# Altium PCB МЦТР.00010582.00.002.PcbDoc
Units mm, origin at the board's own origin, x right, y up, seen from the top; angles counter-clockwise.
Board outline 112.2 x 115.2 mm, 4 copper layers (Top Layer, GND, Power, Bottom Layer), stack 1.486 mm thick; 91 components, 94 nets, 320 pads, 62 vias.
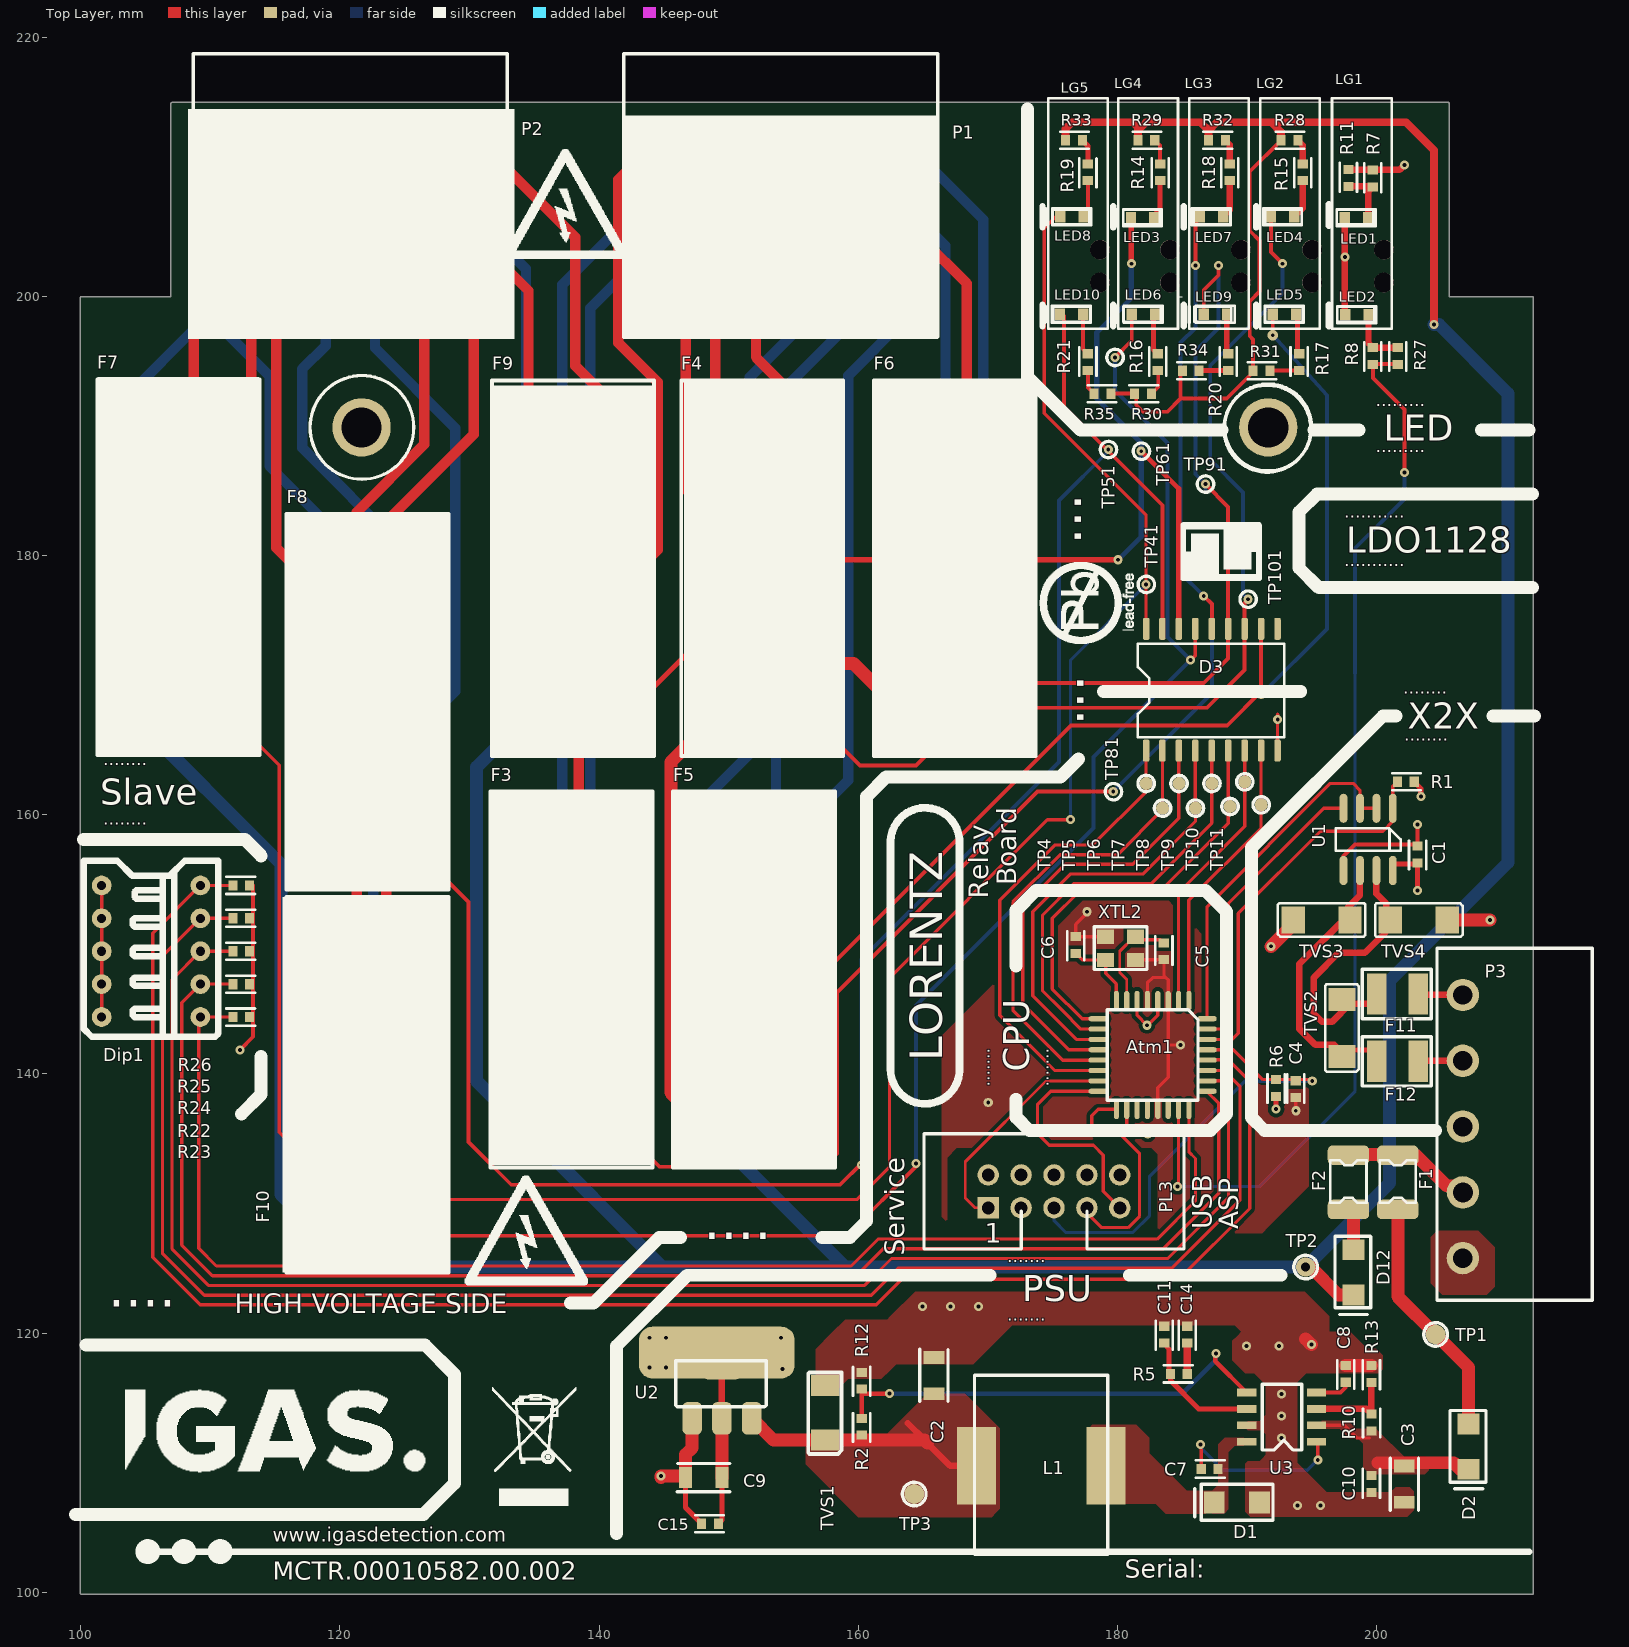
[diagram p0: Top Layer view]
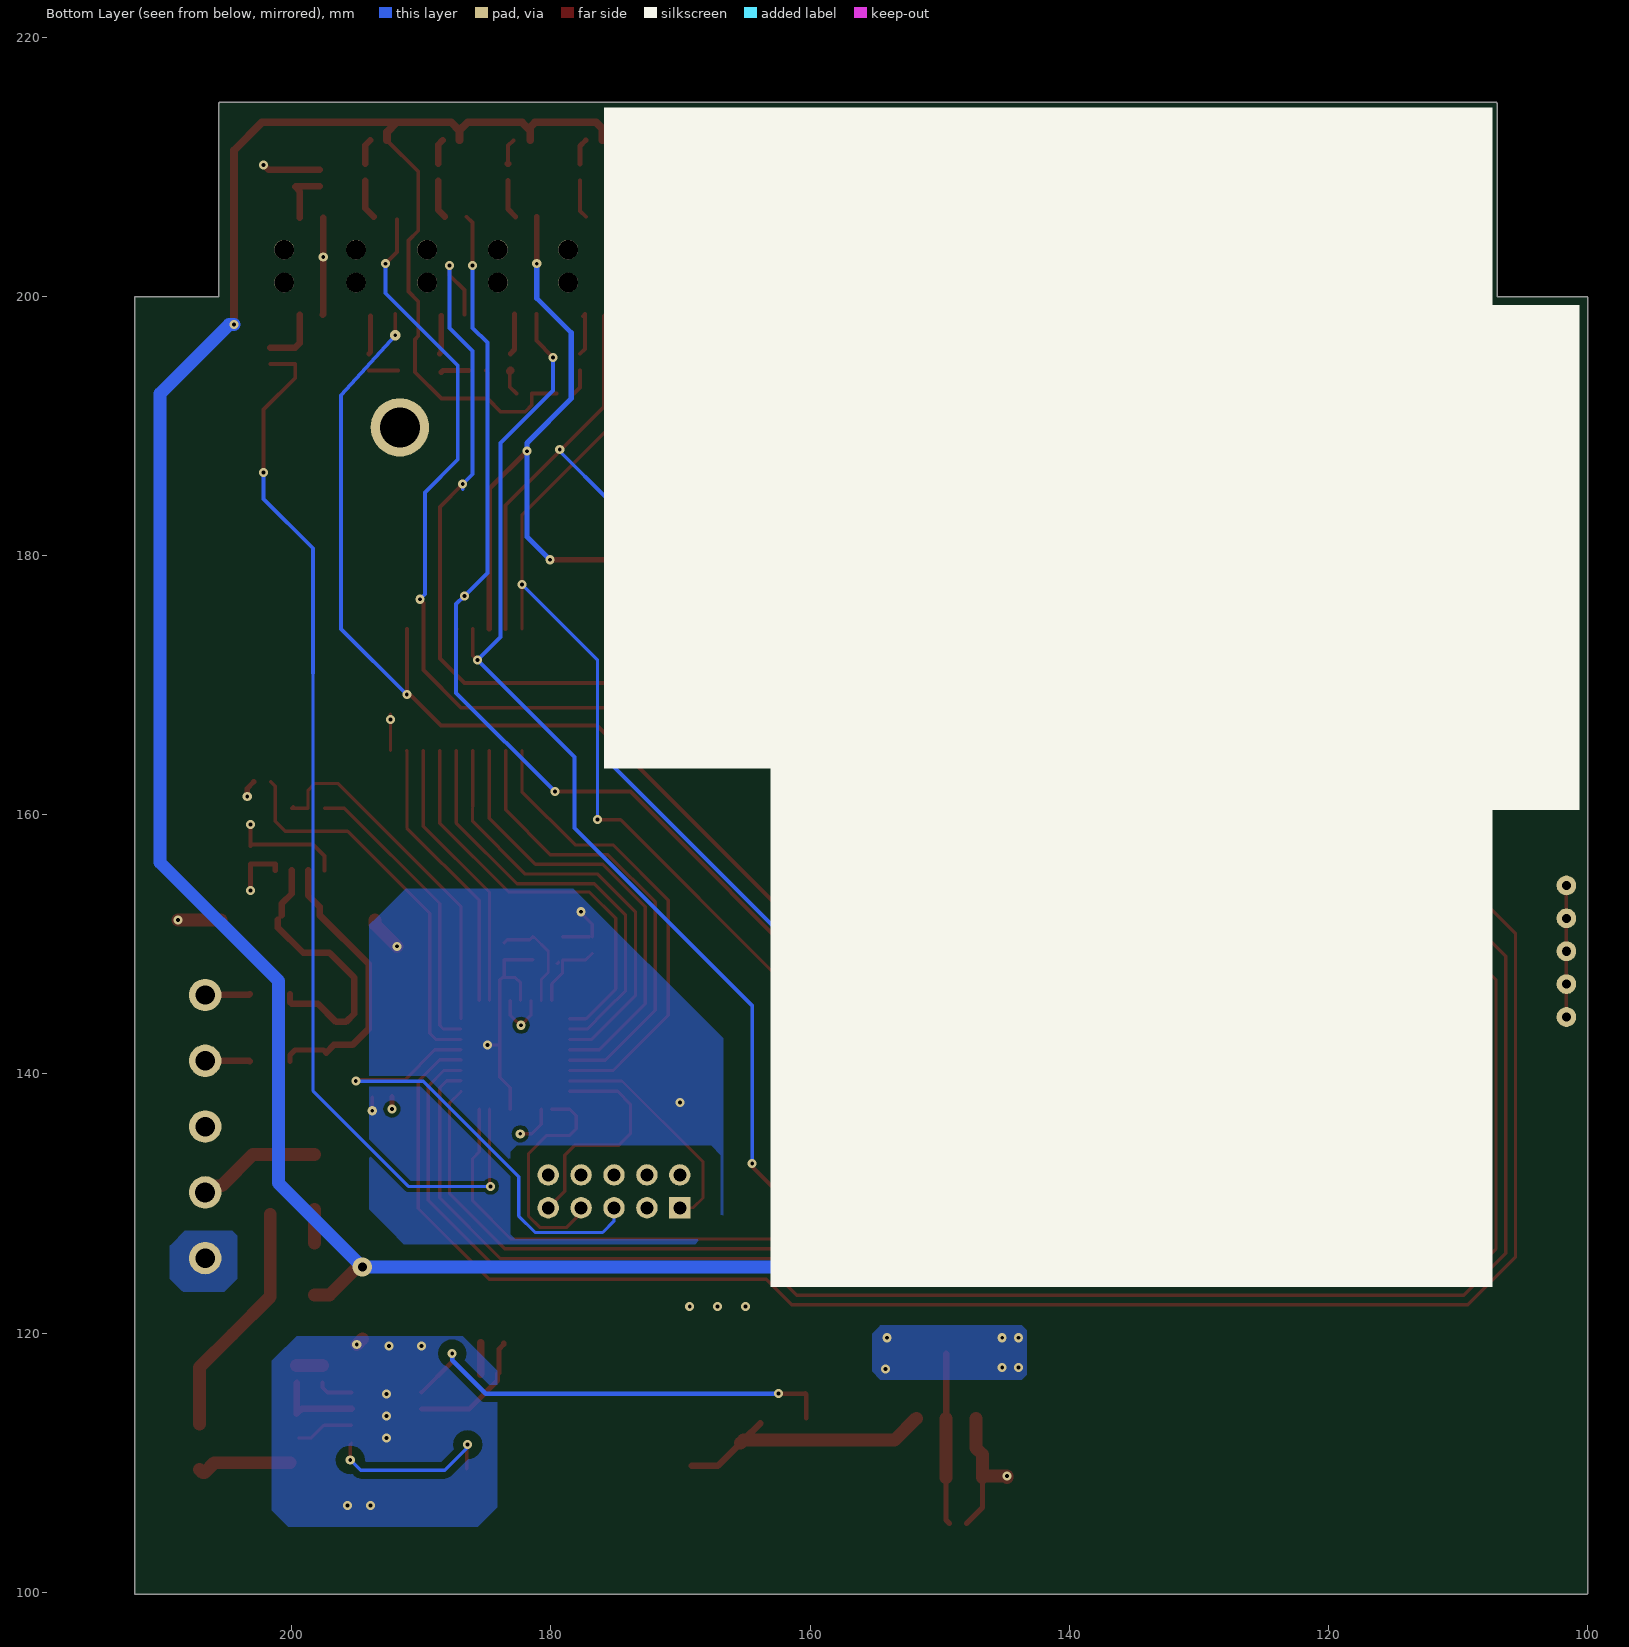
[diagram p1: Bottom Layer view, seen from below]
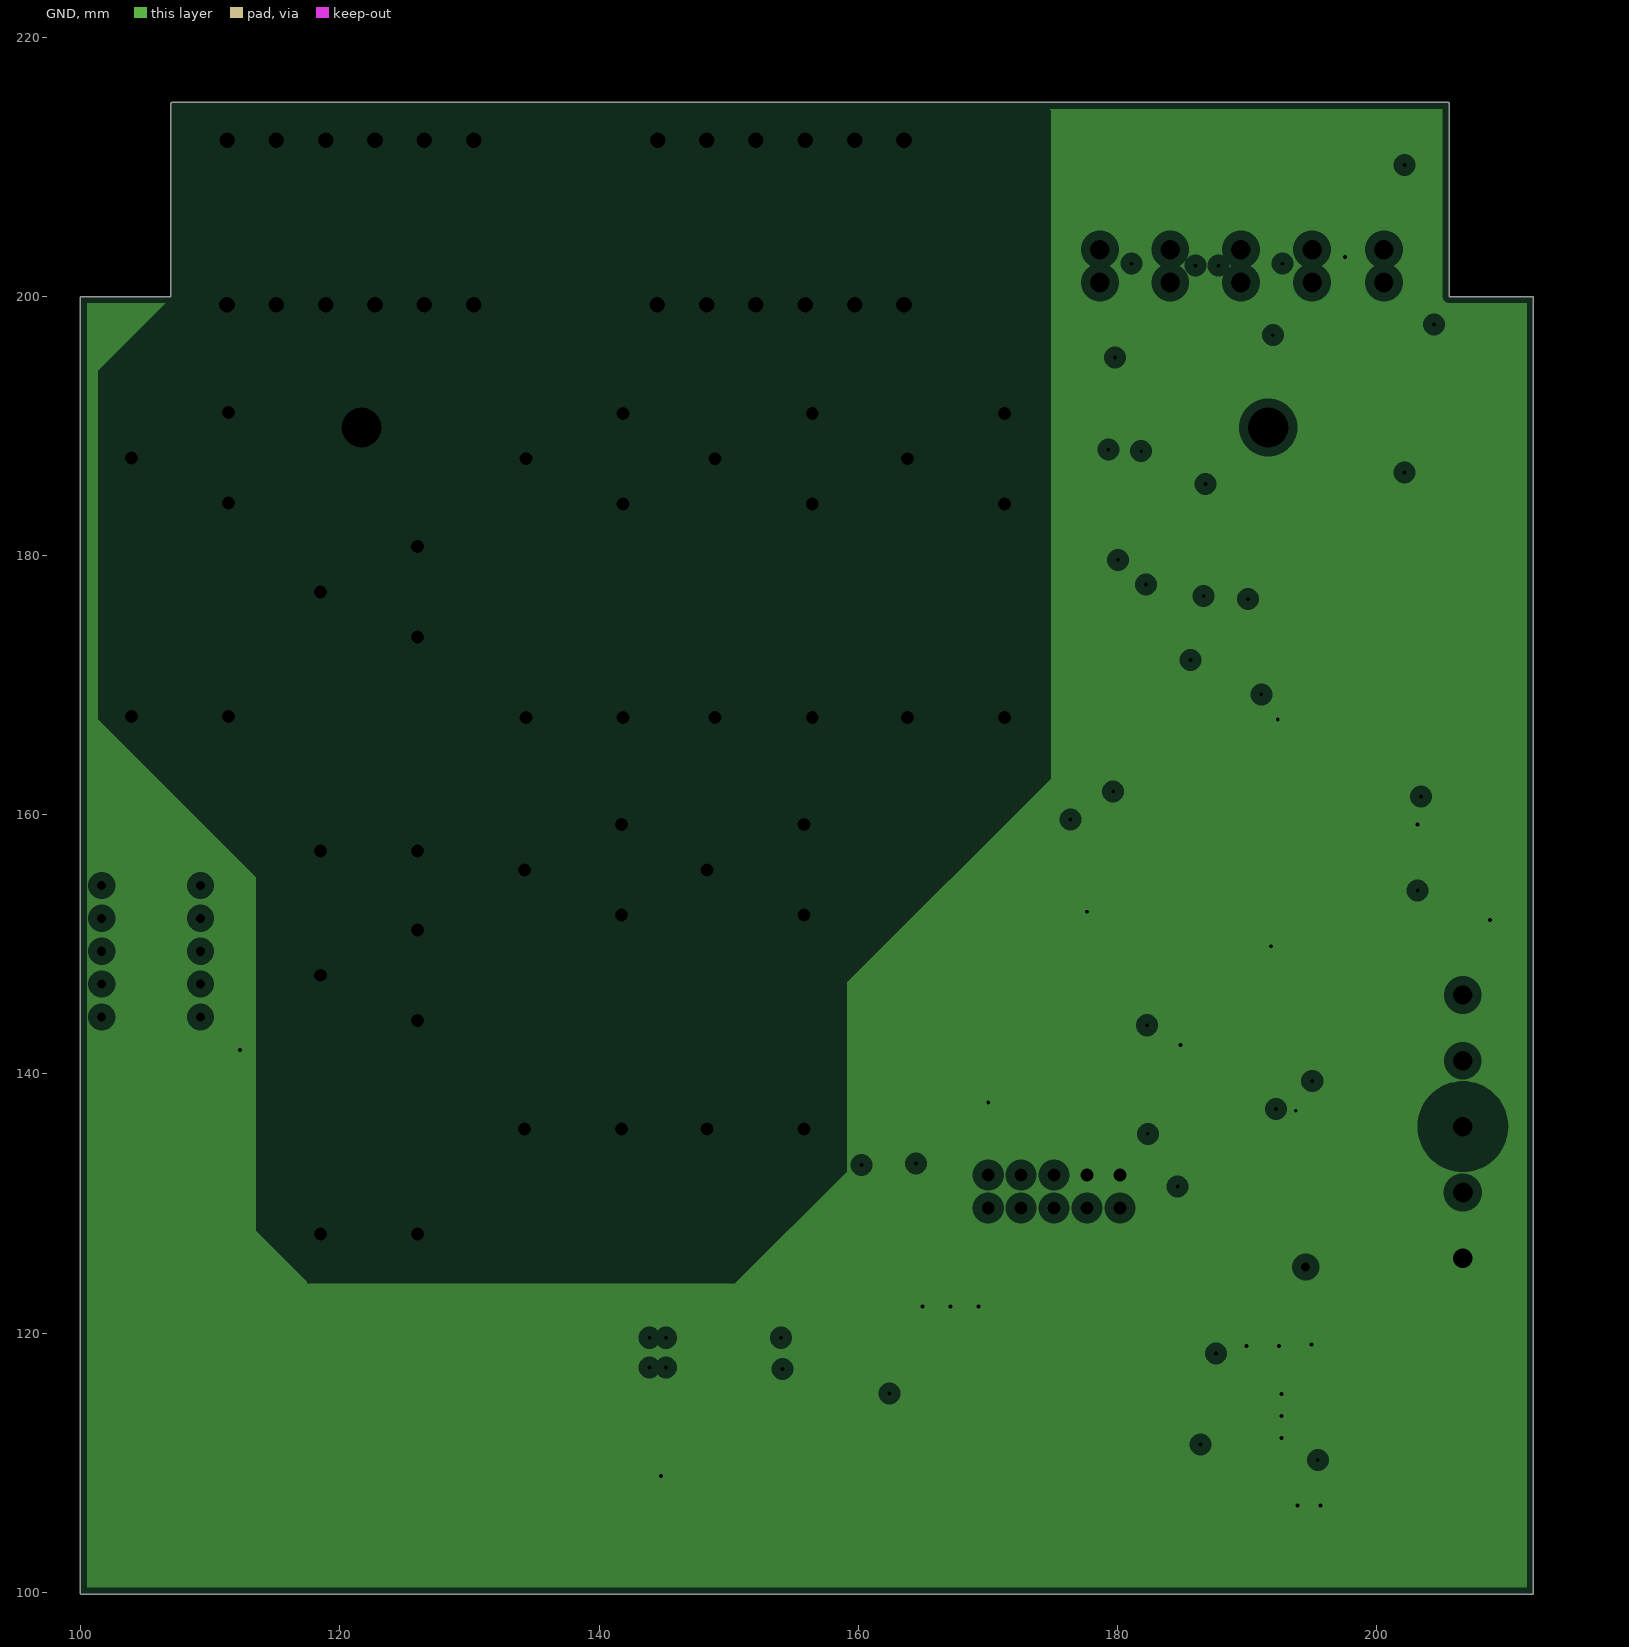
[diagram p2: GND, clearances drawn from the general rule]
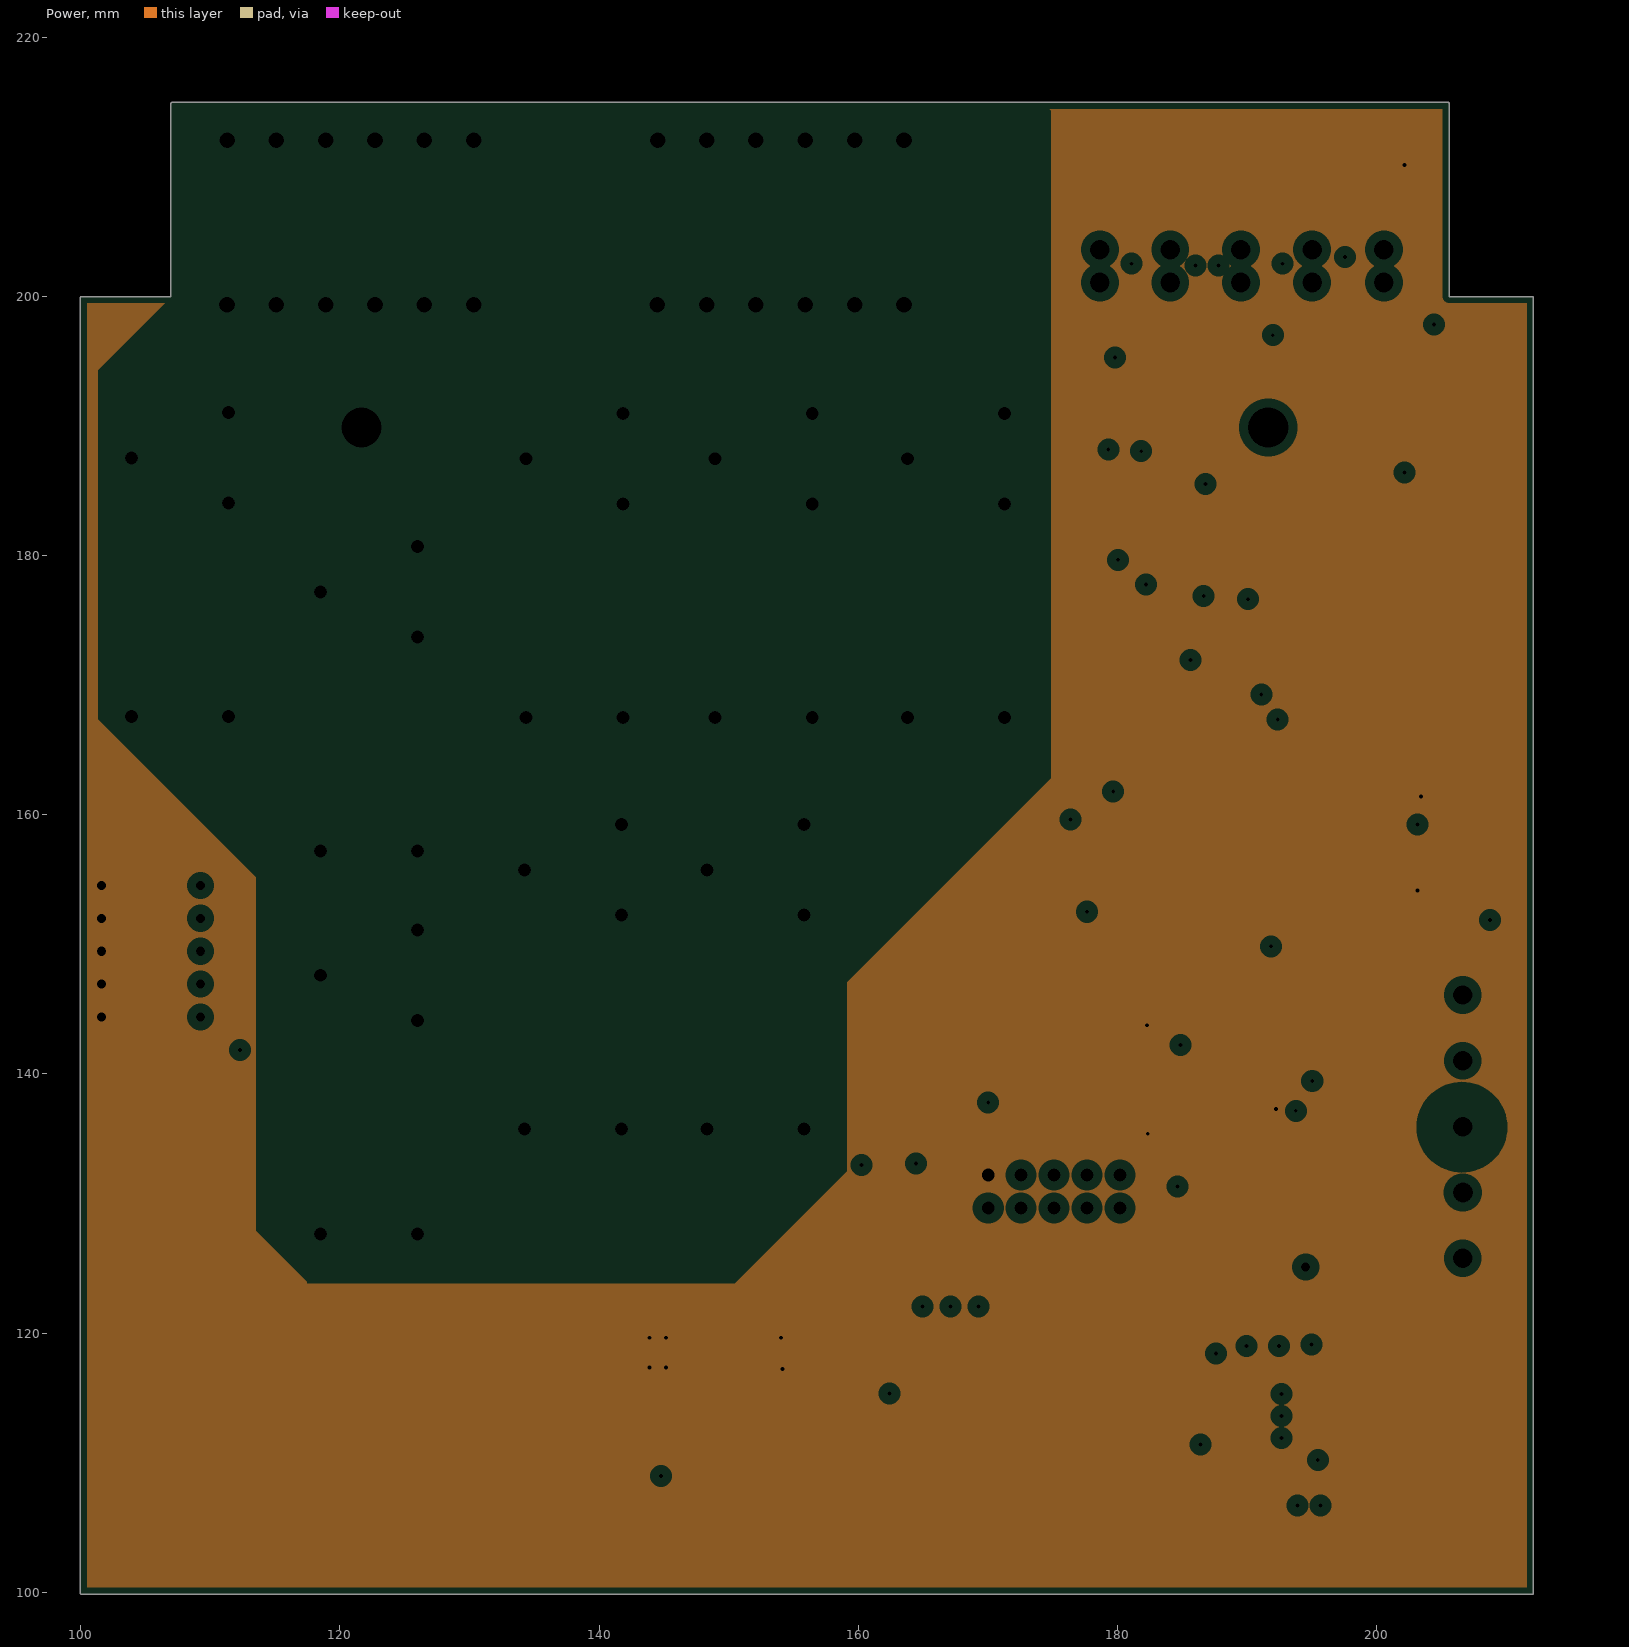
[diagram p3: Power, clearances drawn from the general rule]
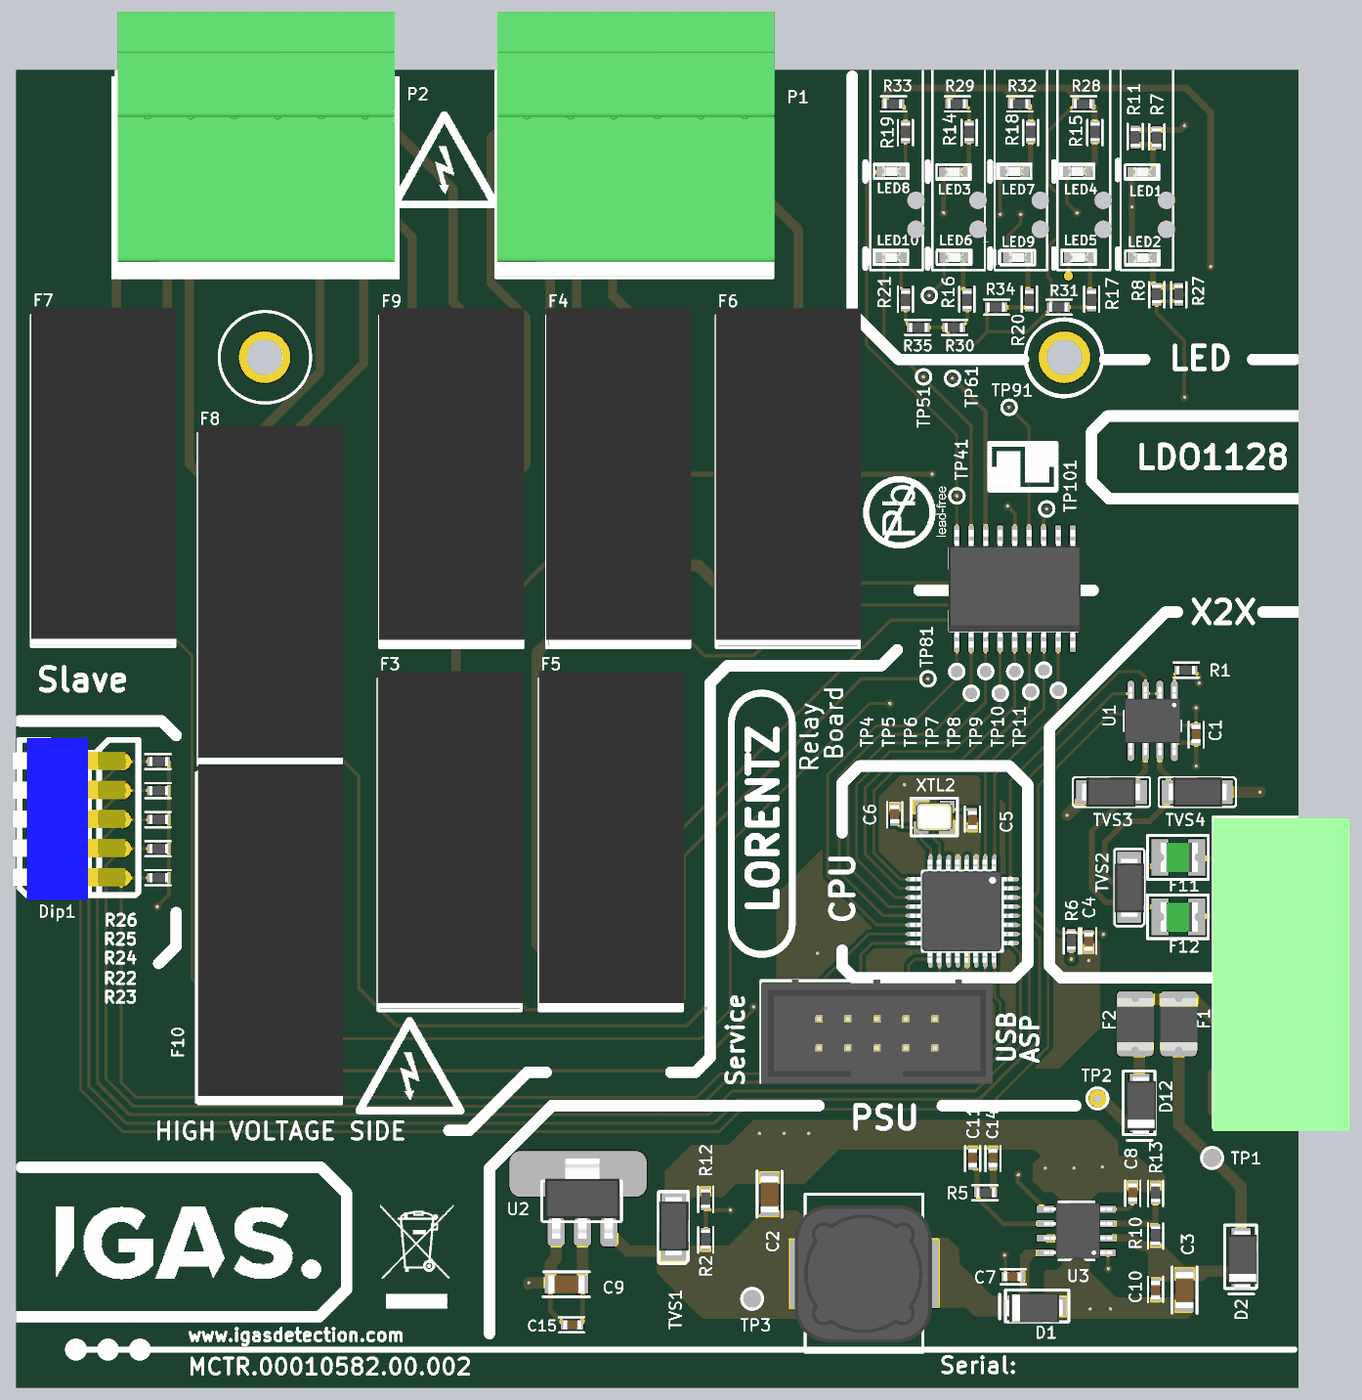
[diagram p4: 3D render of the assembled board from above, using the file's embedded part models]

## Layer stack, top to bottom
Top Solder: solder mask 0.0102, Solder Resist, Dk 3.5
Top Layer: signal copper 0.0356
Dielectric1: prepreg 0.127, FR-4, Dk 4.2
GND: plane copper 0.0356, net GND
Dielectric 3: core 1.09, Dk 4.2
Power: plane copper 0.0356, net +5V
Dielectric 2: prepreg 0.127, Dk 4.2
Bottom Layer: signal copper 0.0356
Bottom Solder: solder mask 0.0102, Solder Resist, Dk 3.5

## Board outline
99.95,99.925 99.95,199.925 cw(c100.05,199.925) 100.05,200.025 103.913,200.025 cw(c103.913,199.925) 103.913,200.025 106.95,200.025 106.95,214.925 cw(c107.05,214.925) 107.05,215.025 205.55,215.025 cw(c205.55,214.925) 205.65,214.925 205.65,200.025 212.05,200.025 cw(c212.05,199.925) 212.15,199.925 212.15,99.925 cw(c212.05,99.925) 212.05,99.825 100.051,99.825 cw(c100.05,99.925)

## Design rules (kind name [scope] priority, off if disabled: settings)
Clearance [All] p1: gap=0.3 ignorepadtopadclearanceinfootprint=FALSE except(0: Arc-Hole Track-Hole SMDPad-Hole THPad-Hole Via-Hole Fill-Hole Poly-Hole Region-Hole Text-Hole)
HoleSize [All] p1: absolutevalues=TRUE maxlimit=4.54 minlimit=0.025 maxpercent=80.000 minpercent=20.000
PlaneClearance [All] p1: clearance=0.7
PlaneConnect [All] p1: planeconnectstyle=Direct reliefexpansion=0.5 reliefentries=2 reliefconductorwidth=0.254 reliefairgap=0.3
PolygonConnect [All] p1: connectstyle=Direct reliefconductorwidth=0.254 reliefentries=2 polygonreliefangle="90 Angle" airgapwidth=0.4
RoutingVias [All] p1: holewidth=0.711 width=1.27 viastyle="Through Hole" minholewidth=0.4 minwidth=0.4 maxholewidth=3 maxwidth=4
SilkToSilkClearance [All] p1 off: silktosilkclearance=0.254
SilkToSolderMaskClearance [IsPad] p1 off: minsilkscreentomaskgap=0.254 clearancetoexposedcopper=TRUE
SolderMaskExpansion [All] p1: expansion=0.102
Width [All] p1: maxlimit=1.254 minlimit=0.22 preferedwidth=0.254
25 further rules are at their usual default settings.

## Classes and differential pairs
component class RS485: C1 F11 F12 R1 TVS2 TVS3 TVS4 U1
component class CPU: Atm1 C4 C5 C6 Dip1 LED1 LED2 LG1 PL3 R6 R7 R8 R11 R22 R23 R24 R25 R26 R27 XTL2
component class Plugs: P3
component class PSU: C2 C3 C7 C8 C9 C10 C11 C14 C15 D1 D2 D12 F1 F2 L1 R2 R5 R10 R12 R13 TVS1 U2 U3
component class Relays: D3 F3 F4 F5 F6 F7 F8 F9 F10 LED3 LED4 LED5 LED6 LED7 LED8 LED9 LED10 LG2 LG3 LG4 LG5 P1 P2 R14 R15 R16 R17 R18 R19 R20 R21 R28 R29 R30 R31 R32 R33 R34 R35

## Components (designator, comment, footprint, x,y, rotation, side; value= is the part's Value field where it differs from the comment)
Atm1 "" Atmega168 185.547,145.669 r180 top
C1 "100n" 0603_Cap 203.2,157.607 r180 top
C2 "22uF" 1206_CAP 165.862,118.11 r180 top
C3 "10uF" 1206_CAP 202.184,106.934 r0 top
C4 "100n" 0603_Cap 193.802,138.176 r0 top
C5 "18p" 0603_Cap 183.619,148.827 r0 top
C6 "18p" 0603_Cap 176.819,150.605 r180 top
C7 "100n" 0603_Cap 186.5,109.5 r270 top
C8 "10n" 0603_Cap 197.65,117.5 r180 top
C9 "22uF" 1206_CAP 146.685,108.839 r270 top
C10 "100n" 0603_Cap 199.644,107.696 r0 top
C11 "18p" 0603_Cap 183.642,120.523 r180 top
C14 "10n" 0603_Cap 185.42,120.523 r180 top
C15 "100n" 0603_Cap 149.225,105.283 r90 top
D1 "" B340A-13-F 187.5,106.9 r0 top
D2 "" B340A-13-F 207.137,109.474 r90 top
D3 "" "SOIC 18" 182.245,164.973 r0 top
D12 "" B340A-13-F 198.247,122.936 r90 top
Dip1 "" "DipSwitch 5" 101.6,154.559 r270 top
F1 "" "Fuse USMF030" 201.676,129.54 r90 top
F2 "" "Fuse USMF030" 197.866,129.54 r90 top
F3 "finder" 413190240010 141.732,135.763 r90 top
F4 "finder" 413190240010 156.464,167.513 r90 top
F5 "finder" 413190240010 155.829,135.763 r90 top
F6 "finder" 413190240010 171.323,167.513 r90 top
F7 "finder" 413190240010 111.386,167.589 r90 top
F8 "finder" 413190240010 125.984,157.226 r90 top
F9 "finder" 413190240010 141.859,167.513 r90 top
F10 "finder" 413190240010 125.984,127.635 r90 top
F11 "Fuse PTS" 1210_MF 203.252,146.177 r90 top
F12 "Fuse PTS" 1210_MF 203.252,140.97 r90 top
L1 "" CDRH127/LDNP-270MC, 179.15,109.75 r90 top
LED1 "" "0603 - LED" 199.39,206.121 r90 top
LED2 "" "0603 - LED" 199.415,198.628 r90 top
LED3 "" "0603 - LED" 182.88,206.121 r90 top
LED4 "" "0603 - LED" 193.691,206.19 r90 top
LED5 "" "0603 - LED" 193.827,198.672 r90 top
LED6 "" "0603 - LED" 182.935,198.672 r90 top
LED7 "" "0603 - LED" 188.189,206.19 r90 top
LED8 "" "0603 - LED" 177.43,206.19 r90 top
LED9 "" "0603 - LED" 188.493,198.65 r90 top
LED10 "" "0603 - LED" 177.38,198.672 r90 top
LG1 "" "LED SMD DayLight" 200.6,203.65 r180 top
LG2 "" "LED SMD DayLight" 195.063,203.65 r180 top
LG3 "" "LED SMD DayLight" 189.561,203.65 r180 top
LG4 "" "LED SMD DayLight" 184.103,203.65 r180 top
LG5 "" "LED SMD DayLight" 178.675,203.65 r180 top
P1 "" "mcd 1,5/6-G1-3.81" 163.55,199.4 r0 top
P2 "" "mcd 1,5/6-G1-3.81" 130.325,199.4 r0 top
P3 "" "MSTBA 1757271" 206.7,146.1 r270 top
PL3 "" IDC-10MS 170.053,129.667 r0 top
R1 "10k" 0603_Res 201.646,162.56 r270 top
R2 "10k" 0603_Res 160.274,113.411 r180 top
R5 "10k" 0603_Res 185.42,116.84 r90 top
R6 "10k" 0603_Res 192.278,139.573 r180 top
R7 "1k" 0603_Res 199.75,208.5 r0 top
R8 "1k" 0603_Res 199.75,196.088 r180 top
R10 "100k" 0603_Res 199.65,113.75 r180 top
R11 "1k" 0603_Res 197.866,208.534 r0 top
R12 "1k4" 0603_Res 160.274,116.967 r180 top
R13 "10k" 0603_Res 199.644,117.475 r180 top
R14 "1k" 0603_Res 183.328,210.278 r180 top
R15 "1k" 0603_Res 194.338,210.278 r180 top
R16 "1k" 0603_Res 183.134,194.31 r0 top
R17 "1k" 0603_Res 194.056,194.31 r0 top
R18 "1k" 0603_Res 188.711,210.278 r180 top
R19 "1k" 0603_Res 177.75,210.278 r180 top
R20 "1k" 0603_Res 188.595,194.31 r0 top
R21 "1k" 0603_Res 177.75,194.31 r0 top
R22 "10k" 0603_Res 113.03,144.399 r90 top
R23 "10k" 0603_Res 113.03,146.939 r90 top
R24 "10k" 0603_Res 113.03,149.479 r90 top
R25 "10k" 0603_Res 113.03,152.019 r90 top
R26 "10k" 0603_Res 113.03,154.559 r90 top
R27 "1k" 0603_Res 201.676,196.088 r180 top
R28 "1k" 0603_Res 192.659,212.09 r270 top
R29 "1k" 0603_Res 181.61,212.09 r270 top
R30 "1k" 0603_Res 181.356,192.532 r270 top
R31 "1k" 0603_Res 190.5,194.31 r270 top
R32 "1k" 0603_Res 187.071,212.09 r270 top
R33 "1k" 0603_Res 176.022,212.09 r270 top
R34 "1k" 0603_Res 185.039,194.31 r270 top
R35 "1k" 0603_Res 179.528,192.532 r90 top
TVS1 "TVS Diode" SM6T 157.48,115.951 r270 top
TVS2 "" DO-214AC 197.358,141.351 r90 top
TVS3 "" DO-214AC 193.593,151.892 r0 top
TVS4 "" DO-214AC 205.486,151.892 r180 top
U1 "" EIA485 199.39,158.115 r270 top
U2 "" SOT223 147.32,113.411 r0 top
U3 "PSU" "SOIC 8" 195.4,111.6 r90 top
XTL2 "16.0 MHz" "KX-7 XTAL" 181.419,150.605 r180 top

## Footprints (in the part's own frame and the unit in brackets; to place one, negate y for a bottom-side part, rotate by r counter-clockwise, add the part's x,y. Pads: shape width x height; smd on the part's side, far side on the other; paste and mask are expansions set on the pad)
"0603 - LED" [mm]
  rect 0.9x0.8 smd mask+0.102: 1(0,0) 2(0,1.803)
  silkscreen extent -0.66,-0.58 0.66,2.92, body extent -0.4,0.09 0.4,1.69, height 0.7
0603_Cap [mm]
  rect 0.8x0.7 smd mask+0.102: 1(0,0) 2(0,1.3)
  silkscreen extent -0.66,-0.41 0.66,1.8, body extent -0.4,-0.16 0.4,1.44, height 0.9
0603_Res [mm]
  rect 0.8x0.7 smd mask+0.102: 1(0,0) 2(0,1.3)
  silkscreen extent -0.66,-0.41 0.66,1.8, body extent -0.4,-0.16 0.4,1.44, height 0.55
1206_CAP [mm]
  rect 1.6x1 smd: 1(0,0) 2(0,2.8)
  silkscreen extent -1.09,-0.63 1.09,3.4, body extent -0.8,-0.2 0.8,3, height 1.8
1210_MF [mm]
  rect 3.2x1.5 smd: 1(0,0) 2(0,3.2)
  silkscreen extent -1.91,-1.02 1.91,4.32, body extent -1.29,-0.08 1.29,3.13, height 1.2
413190240010 [mm] "Finder"
  round 1.8 hole 1: 11(19.99,7.5) 12(16.51,0) 14(23.5,0) A1(0,0) A2(0,7.493)
  silkscreen extent -2.97,-2.39 26.04,10.11, body extent -2.31,-2.54 26.69,10.16, height 15.7
Atmega168 [mm]
  oval 0.4x1.5 smd mask+0.05: 1(0,0) 2(0.8,0) 3(1.6,0) 4(2.4,0) 5(3.2,0) 6(4,0) 7(4.8,0) 8(5.6,0) 17(5.6,8.4) 18(4.8,8.4) 19(4,8.4) 20(3.2,8.4) 21(2.4,8.4) 22(1.6,8.4) 23(0.8,8.4) 24(0,8.4)
  oval 1.5x0.4 smd mask+0.05: 9(7,1.4) 10(7,2.2) 11(7,3) 12(7,3.8) 13(7,4.6) 14(7,5.4) 15(7,6.2) 16(7,7) 25(-1.4,7) 26(-1.4,6.2) 27(-1.4,5.4) 28(-1.4,4.6) 29(-1.4,3.8) 30(-1.4,3) 31(-1.4,2.2) 32(-1.4,1.4)
  silkscreen extent -0.7,0.7 6.3,7.7, body extent -1.63,-0.31 7.37,8.69, height 1.2
B340A-13-F [mm]
  rect 1.6x1.7 smd: 1(0,0) 2(3.5,0)
  silkscreen extent -1.5,-1.35 4.55,1.42, body extent -1.05,-1.41 4.09,1.15, height 2.62
CDRH127/LDNP-270MC, [mm]
  rect 6x3 smd: 1(0,0) 2(0,10)
  silkscreen extent -6.86,-0.13 6.98,10.16, body extent -6,-0.92 6,11.08, height 8
"DipSwitch 5" [mil]
  round 60 hole 27.56: 1(0,0) 2(100,0) 3(200,0) 4(300,0) 5(400,0) 12(400,300) 13(300,300) 14(200,300) 15(100,300) 16(0,300)
  silkscreen extent -75,-55 460,355, body extent -80,-79 476,312, height 390
DO-214AC [mm]
  rect 1.8x2.1 smd: 1(0,0) 2(4.4,0)
  silkscreen extent -1.19,-1.3 5.56,1.3, body extent -0.45,-1.3 4.76,1.3, height 2.4
EIA485 [mm] "SOIC, 8-Leads, Body 4,90x3,90mm, Pitch 1,27mm, IPC Medium Density"
  oval 2.25x0.6 smd: A(2.4,0.635) B(2.4,-0.635) Gnd(2.4,-1.905) Pwr(2.4,1.905) Rx(-2.4,1.905) Tx(-2.4,-1.905) TxEn1(-2.4,0.635) TxEn2(-2.4,-0.635)
  silkscreen extent -0.87,-2.5 0.87,2.5, body extent -2.99,-2.45 3,2.45, height 1.75
"Fuse USMF030" [mm]
  rrect50% 1.5x3.2 smd: 0(0,0) 1(4.191,0)
  silkscreen extent 0.51,-1.4 3.81,1.4, body extent -0.24,-1.62 4.31,1.62, height 0.85
IDC-10MS [mm]
  rect 1.65x1.65 hole 1: 1(0,0)
  round 1.65 hole 1: 2(0,2.54) 3(2.54,0) 4(2.54,2.54) 5(5.08,0) 6(5.08,2.54) 7(7.62,0) 8(7.62,2.54) 9(10.16,0) 10(10.16,2.54)
  silkscreen extent -4.95,-3.17 15.11,5.71, body extent -4.94,-3.28 15.36,5.82, height 9.1
"KX-7 XTAL" [mm]
  rect 1.3x1.1 smd: 1(0,0) 2(0,1.8) 2(2.3,0) 3(2.3,1.8)
  silkscreen extent -0.89,-0.76 3.17,2.54, body extent -0.46,-0.36 2.74,2.14, height 0.8
"LED SMD DayLight" [mm]
  round 1.52 hole 1.52 paste+0 mask+0: 0(0,2.54) 0(0,0)
  silkscreen extent -0.6,-11.7 4.34,6.1
"mcd 1,5/6-G1-3.81" [mil]
  round 60 hole 47.24: 1(-749,500) 2(-750,0) 3(-600,500) 4(-600,0) 5(-450,500) 6(-450,0) 7(-300,500) 8(-300,0) 9(-150,500) 10(-150,0) 11(0,500) 12(0,0)
  silkscreen extent -852,-99 102,763, body extent -847,-45 107,817, height 894
"MSTBA 1757271" [mm]
  round 2.5 hole 1.5: 1(0,0) 2(5.08,0) 3(10.16,0) 5(20.32,0)
  round 2.5 hole 1.55: 4(15.24,0)
  silkscreen extent -3.6,-2 23.56,10, body extent -3.52,-2.03 23.88,9.97, height 8.6
SM6T [mm]
  rect 1.6x2.2 smd: 1(0,0) 2(4.22,0)
  silkscreen extent -0.99,-1.32 5.28,1.24, body extent -0.57,-1.3 4.64,1.3, height 2.4
"SOIC 8" [mm]
  rect 0.6x1.5 smd: 1(0,0) 2(1.27,0) 3(2.54,0) 4(3.81,0) 5(3.81,5.4) 6(2.54,5.4) 7(1.27,5.4) 8(0,5.4)
  silkscreen extent -0.64,1.14 4.44,4.19, body extent -0.55,-0.46 4.36,5.53, height 1.75
"SOIC 18" [mm]
  rrect50% 0.5x1.7 smd: 1(0,0) 2(1.255,0) 3(2.525,0) 4(3.795,0) 5(5.065,0) 6(6.335,0) 7(7.605,0) 8(8.875,0) 9(10.145,0) 10(10.145,9.4) 11(8.875,9.4) 12(7.605,9.4) 13(6.335,9.4) 14(5.065,9.4) 15(3.795,9.4) 16(2.525,9.4) 17(1.255,9.4) 18(0,9.4)
  silkscreen extent -0.64,1.02 10.67,8.25, body extent -0.7,-0.45 10.86,9.85, height 2.65
SOT223 [mm]
  rrect50% 1.5x2.5 smd mask+0.1: 1(-0.127,0) 2(2.173,0) 3(4.473,0)
  rrect50% 4x4 smd: 2(2.173,5)
  silkscreen extent -1.4,0.89 5.59,4.44, body extent -1.09,-0.58 5.41,6.42, height 1.8

## Part data
Atm1: library part Atmega328, Part Number=Atmega328P-AU, Part Description="8-bit MCU 32KB 20MHz 1.8V-5.5V"
C1 C4 C15: library part "Capasitor 0805", Part Number=CC0603ZRY5V9BB104
  C1 C15: Part Description="Multilayer Ceramic Capacitors 50 V 0.1uF Y5V 0603 -20/+80%"
  C4: Part Description="Multilayer Ceramic Capacitor 50 V 0.1uF Y5V 0603 -20/+80%"
C2 C9: library part "0805 Cap", Part Number=CC1206KKX5R7BB226, Part Description="Multilayer Ceramic Capacitor 16V 22uF X5R 1206 10%"
C3: library part "0805 Cap", Part Number=CC1206KKX5R9BB106, Part Description="Capacitors MLCC 50V 10uF X5R 1206 10%"
C5 C6: library part "Capasitor 0805", Part Number=CC0603JRNPO9BN180, Part Description="Multilayer Ceramic Capacitor 50 V 18 pF C0G 0603 5%"
C7 C10: library part "0805 Cap", Part Number=CC0603ZRY5V9BB104
  C7: Part Description="Multilayer Ceramic Capacitors 50 V 0.1uF Y5V 0603 -20/+80%"
  C10: Part Description="Ceramic Capacitors MLCC - 50 V 0.1uF Y5V 0603 -20/+80%"
C8 C14: library part "0805 Cap", Part Number=CC0603ZRY5V9BB103, Part Description="Multilayer Ceramic Capacitor 50V 0.01uF Y5V 0603 -20/+80%"
C11: library part "0603 CAP", Part Number=CC0603JRNPO9BN180, Part Description="Multilayer Ceramic Capacitors 50 V 18 pF C0G 0603 5%"
D1 D12: library part B340A-13-F, Part Number=B340A-13-F
  D1: Part Description="Schottky Diodes 40V 3A"
  D12: Part Description="Schottky Diode 40V 3A"
D2: library part B340A-13-F, Part Number="Schottky Diode 40V 3A", Part Description=B340A-13-F
D3: library part "ULN2803 Darlington_1", Part Number=ULN2803ADWR, Part Description="Darlington Transistors Eight NPN Array"
Dip1: library part DipSwitch5, Part Number=DPL-05-V, Part Description="Bit switch 5 bits"
F1 F2: library part "Fuse PTS", Part Number=MF-MSMF030-2, Part Description="Resettable Fuses - PPTC 30V 300MA"
F3: Part Number=G2RL124DC, Part Description="General Purpose Relays"
F4 F5 F6 F7 F8 F9 F10: "G2RL124DC", Part Description="General Purpose Relays", Part Number=G2RL124DC
F11 F12: Part Number=MF-USMF005-2, Part Description="Resettable Fuses - PPTC 30V 50MA"
L1: library part CDRH127/LDNP-270MC, Part Number=CDRH127/LDNP-220MC, Part Description="Power Inductors - SMD 22uH 4.7A"
LED1 LED2 LED3 LED4 LED5 LED6 LED7 LED8 LED9 LED10: library part "LED 0603", Part Number=KP-1608SGC, Part Description="0603 Single Colour LED Green"
LG1 LG2 LG3 LG4 LG5: library part "Light Guide 2", Part Number=5151094F, Part Description="Light Guide"
P1 P2: library part "MCD 1.5/6 Phoenix", LatestRevisionDate=17-Jul-2002, LatestRevisionNote="Re-released for DXP Platform.", Part Description="Pluggable Terminal Blocks", Part Number="MCD 1.5/6 Phoenix", Publisher="Altium Limited"
P3: library part "MSTBA 2,5/ 5-G-5,08 - 1757271", Part Description="Pluggable Terminal Blocks 5 Pos", Part Number="MSTBA 2,5/ 5-G-5,08 - 1757271"
PL3: library part IDC-10MS, Part Number=DS1013-10SSIB1-B-0, Part Description="Socket; IDC; male; PIN: 10; straight;"
R1 R2 R5 R6 R13 R22 R23 R24 R25 R26: library part "Resistor 0805", Part Number=RT0603FRE0710KL, Part Description="Thin Film Resistors - SMD 10K ohm 1% 1/10W"
R7 R8 R11 R14 R15 R16 R17 R18 R19 R20 R21 R27 R28 R29 R30 R31 R32 R33 R34 R35: library part "Resistor 0805", Part Number=RC0603FR-071KL, Part Description="Thick Film Resistor - 0603, 1kOhms, 1%, 1/10W"
R10: library part "Resistor 0805", Part Number=RC0603FR-07100KL, Part Description="Thick Film Resistor - 0603, 100kOhms, 1%, 1/10W"
R12: library part "Resistor 0805", Part Number=RC0603FR-071K4L, Part Description="Thick Film Resistor 0603, 1.4kOhms, 1%, 1/10W"
TVS1: library part SM6T12CA, Part Description="TVS Diodes 600W 12V Bidirect", Part Number=SM6T12CA
TVS2 TVS3 TVS4: library part SMAJ5.0CA, Part Description="ESD Protection Diodes 5volts 800/1600uA 43.5 Amps Bi-Dir", Part Number=SMAJ5.0CA
U1: library part MAX485, Part Number=SN65HVD3082EDR, Part Description="RS-485 Interface IC Low-Power"
U2: library part NCV1117ST50T3G, Part Number=LM1117MPX-5.0, Part Description="LDO 800MA 5V"
U3: library part TPS54331, Part Number=TPS54331DR, Part Description="Switching Voltage Regulators 3A 28V"
XTL2: library part KX-7, Part Number="Geyer KX-7 16.0 MHz", Part Description="CRYSTAL 16.0000MHZ 18PF"

## Free pads (board coordinates)
  round 4.5 hole 3.1: 0(121.67,189.925) 0(191.67,189.925)
  rrect50% 12x4 smd: 0(149.098,118.491)
  round 1.524 smd: 0(164.338,107.569) 0(204.597,119.888)
  round 1 smd: 0(182.245,162.433) 0(183.515,160.528) 0(184.785,162.433) 0(186.055,160.528) 0(187.325,162.433) 0(188.722,160.655) 0(189.865,162.56) 0(191.135,160.782)

## Via types
v1: diameter 0.7, hole 0.3, Top Layer to Bottom Layer, tented both sides, 60 vias
v2: diameter 0.8, hole 0.3, Top Layer to Bottom Layer, 1 vias
v3: diameter 1.5, hole 0.7, Top Layer to Bottom Layer, 1 vias

## Nets (pads, with @x,y where several pads share a name; then routed paths per layer and width w, separated by ;. In a path a pad name is that pad's centre, name@x,y a point inside that pad or via, vN(x,y) a via of type N, cw(c..) or ccw(c..) an arc to the next point about the centre after c; other vN are vias at no path point)
+5V: Atm1.4 Atm1.6 Atm1.18 C1.2 C9.2 C15.1 Dip1.1 Dip1.2 Dip1.3 Dip1.4 Dip1.5 pad.0@149.098,118.491 PL3.2 R1.2 R6.2 R7.2 R11.2 U1.Pwr U2.2 | length 42.2
  Top Layer w0.25: Atm1.18 180.747,136.118 181.483,135.382 v1(182.372,135.382) ; Atm1.6 181.547,144.526 v1(182.308,143.764) ; v1@182.372,143.764 183.147,144.539 Atm1.4
  Top Layer w0.254: Dip1.5 Dip1.4 Dip1.3 Dip1.2 Dip1.1
  Top Layer w0.4: C15.1 149.493,105.551 C9.2@149.493,108.825 ; v1(192.278,137.287) R6.2 ; U1.Pwr 201.295,156.21 203.2,156.21 v1(203.2,154.178) ; R1.2 203.454,162.052 v1(203.454,161.417)
  Top Layer w0.5: U2.2@149.493,113.411 pad.0@149.493,118.411 ; R11.2@197.866,209.804 201.803,209.804 v1(202.184,210.185)
  Top Layer w1: C9.2@149.493,108.825 U2.2@149.493,113.411
  other v1: 154.178,117.221 143.891,117.348 145.161,117.348 143.891,119.634 145.161,119.634 154.051,119.634
+24V: D12.1 F3.A2 F4.A2 F5.A2 F6.A2 F7.A2 F8.A2 F9.A2 F10.A2 R28.1 R29.1 R30.1 R31.1 R32.1 R33.1 R34.1 R35.1 | length 415.2
  Top Layer w0.3: R35.1@179.578,192.532 R30.1 181.483,192.532 181.483,191.643 181.991,191.135 183.896,191.135 184.912,192.151 ; R34.1 184.912,194.183 184.912,192.151 ; R28.1 190.246,209.677 190.246,205.105 191.008,204.343 191.008,200.406 190.246,199.644 190.246,196.977 190.5,196.723 R31.1 190.5,194.183 188.468,192.151 184.912,192.151
  Top Layer w0.6: R33.1 176.022,212.979 176.53,213.487 181.229,213.487 181.61,213.106 181.61,212.852 ; R29.1 181.61,212.852 ; R32.1 187.071,212.852 ; R28.1 192.659,212.725 191.897,213.487 ; v1(204.47,197.866) 204.47,211.328 202.311,213.487 191.897,213.487 ; 181.61,212.852 182.245,213.487 186.436,213.487 187.071,212.852 ; 187.071,212.852 187.706,213.487 191.897,213.487
  Top Layer w1: F5.A2 145.542,138.557 145.542,164.084 F4.A2 153.162,171.704 159.639,171.704 F6.A2 ; v3(194.564,125.095) 194.945,125.095 197.104,122.936 D12.1
  Bottom Layer w1: F7.A2@103.886,167.767 115.443,156.21 115.443,154.178 ; F8.A2 115.443,154.178 ; F9.A2 130.556,163.703 130.556,139.446 F3.A2 144.907,125.095 ; F5.A2 159.004,125.095 ; v1(204.47,197.866) 204.851,197.866 210.185,192.532 210.185,156.337 201.041,147.193 201.041,131.572 v3(194.564,125.095) 159.004,125.095 ; 115.443,154.178 115.443,130.683 F10.A2 121.031,125.095 144.907,125.095 ; 144.907,125.095 159.004,125.095
A1: Atm1.24 Dip1.12 R22.2 | length 107.2
  Top Layer w0.25: R22.2@111.584,144.399 Dip1.12 109.093,144.399 109.093,126.544 110.463,125.174 159.464,125.174 161.544,127.254 183.089,127.254 186.055,130.22 186.055,133.477 185.547,133.985 Atm1.24
A2: Atm1.25 Dip1.13 R23.2 | length 115
  Top Layer w0.25: R23.2@111.584,146.939 Dip1.13 107.787,145.506 107.787,126.789 110.152,124.424 159.857,124.424 161.937,126.504 183.572,126.504 187.845,130.777 187.845,137.746 186.947,138.644 Atm1.25
A3: Atm1.26 Dip1.14 R24.2 | length 122.2
  Top Layer w0.25: R24.2@111.584,149.479 Dip1.14 107.037,147.296 107.037,126.478 109.841,123.674 160.504,123.674 162.584,125.754 183.92,125.754 188.595,130.429 188.595,138.938 188.064,139.469 Atm1.26
A4: Atm1.27 Dip1.15 R25.2 | length 128.9
  Top Layer w0.25: R25.2@111.584,152.019 Dip1.15 106.287,149.086 106.287,126.168 109.531,122.924 161.024,122.924 163.104,125.004 184.231,125.004 189.484,130.257 189.484,139.065 188.28,140.269 Atm1.27
A5: Atm1.28 Dip1.16 R26.2 | length 135.7
  Top Layer w0.25: R26.2@111.584,154.559 Dip1.16 105.537,150.876 105.537,125.857 109.22,122.174 161.417,122.174 163.388,124.145 184.776,124.145 190.246,129.615 190.246,139.446 188.595,141.097 186.975,141.097 Atm1.28
A6: Atm1.19
A7: Atm1.22
CC1: F3.11 P1.3 | length 62.2
  Bottom Layer w0.8: F3.11 137.16,158.681 137.16,200.95 P1.3
CC2: F6.11 P1.9 | length 28.7
  Bottom Layer w0.8: P1.9 159.74,210.973 166.751,203.962 166.751,190.431 F6.11
CC3: F7.11 P2.3 | length 29
  Bottom Layer w0.8: F7.11@103.879,187.757 103.879,192.652 108.712,197.485 108.712,203.708 115.085,210.081 P2.3
CC4: F9.11 P2.9 | length 27.8
  Bottom Layer w0.8: P2.9 126.515,210.035 134.359,202.191 F9.11
CC5: F4.11 P1.4 | length 12.2
  Top Layer w0.8: P1.4 148.971,198.739 148.971,187.51 F4.11
CC6: F5.11 P1.10 | length 48.4
  Bottom Layer w0.8: F5.11 153.67,161.094 153.67,192.278 159.74,198.348 P1.10
CC7: F8.11 P2.4 | length 23.6
  Top Layer w0.8: P2.4 115.085,180.615 F8.11
CC8: F10.11 P2.10 | length 55.1
  Top Layer w0.8: F10.11 118.484,149.403 121.285,152.204 121.285,183.388 126.515,188.618 P2.10
D2: Atm1.1 D3.8 pad.0@191.135,160.782 | length 21.6
  Top Layer w0.254: Atm1.1 185.547,153.416 191.12,158.989 D3.8 D3.8@191.135,164.958
D3: Atm1.2 D3.7 pad.0@189.865,162.56 | length 21.4
  Top Layer w0.254: Atm1.2 184.747,154.013 189.865,159.131 189.865,162.56 189.865,164.958 D3.7
D4: Atm1.9 D3.6 pad.0@188.722,160.655 | length 32.2
  Top Layer w0.254: Atm1.9 177.295,144.269 175.006,146.558 175.006,152.019 177.038,154.051 183.261,154.051 188.58,159.37 D3.6
D5: Atm1.10 D3.5 pad.0@187.325,162.433 | length 33
  Top Layer w0.25: 175.768,144.907 174.244,146.431 174.244,152.273 176.657,154.686 182.626,154.686 187.31,159.37 D3.5
  Top Layer w0.254: 175.768,144.907 177.206,143.469 Atm1.10
D6: Atm1.11 D3.4 pad.0@186.055,160.528 | length 33.7
  Top Layer w0.25: 175.26,144.272 173.482,146.05 173.482,152.527 176.391,155.436 181.979,155.436 186.055,159.512 pad.0@186.055,160.528 ; pad.0@186.04,160.67 D3.4
  Top Layer w0.254: 175.26,144.272 176.863,142.669 Atm1.11
D7: Atm1.12 D3.3 pad.0@184.785,162.433 | length 34.9
  Top Layer w0.25: 174.498,143.637 172.72,145.415 172.72,152.908 175.998,156.186 181.205,156.186 184.77,159.751 D3.3
  Top Layer w0.254: 174.498,143.637 176.266,141.869 Atm1.12
D8: Atm1.13 D3.2 pad.0@183.515,160.528 | length 35.6
  Top Layer w0.25: 174.371,142.494 171.958,144.907 171.958,153.289 175.605,156.936 180.05,156.936 183.5,160.386 D3.2
  Top Layer w0.254: 174.371,142.494 175.796,141.069 Atm1.13
D9: Atm1.14 D3.1 pad.0@182.245,162.433 | length 36.2
  Top Layer w0.25: 173.99,141.478 170.942,144.526 170.942,153.416 175.212,157.686 178.133,157.686 182.245,161.798 182.245,162.433 D3.1
  Top Layer w0.254: 173.99,141.478 175.199,140.269 Atm1.14
GND: Atm1.3 Atm1.5 Atm1.21 C1.1 C2.1 C3.1 C4.1 C5.1 C6.1 C8.1 C9.1 C10.1 C11.1 C14.1 C15.2 D1.2 D3.9 LED1.2 LED2.2 P3.5 PL3.8 PL3.10 R12.1 R13.1 R22.1 R23.1 R24.1 R25.1 R26.1 TVS1.1 TVS3.1 TVS4.1 U1.Gnd U2.1 U3.7 XTL2.2 | length 75.7
  Top Layer w0.25: C6.1 176.819,151.546 v1@177.673,152.4 ; D3.9 192.39,167.782 192.405,167.767 v1(192.405,167.386)
  Top Layer w0.254: C6.1@177.041,150.605 XTL2.2@179.119,150.605 ; XTL2.2@181.419,148.827 C5.1 183.619,147.597 183.769,147.447 ; Atm1.5 182.347,147.041 182.753,147.447 183.769,147.447 ; Atm1.21 183.147,138.951 183.947,139.751 183.947,142.24 ; v1(184.912,142.24) 183.947,142.24 ; 183.769,147.447 183.947,147.269 Atm1.3 183.947,142.24
  Top Layer w0.3: v1(112.268,141.859) 113.284,142.875 113.284,149.479 R26.1@113.284,154.559 ; v1(193.802,137.16) C4.1 ; U1.Gnd 197.485,156.845 198.374,157.734 203.073,157.734 C1.1 v1(203.2,159.258)
  Top Layer w0.4: C9.1 146.685,106.523 C15.2
  Top Layer w0.5: LED1.2 v1(197.587,203.073) 197.587,198.653 LED2.2
  Top Layer w1: v1@144.78,108.839 v1(144.78,108.966) C9.1@146.685,108.966 ; C9.1 C9.1@146.685,108.966 ; U2.1 147.193,111.125 146.685,110.617 C9.1@146.685,108.966 ; v1(191.897,149.86) 193.593,151.556 TVS3.1 ; 194.564,119.536 v1(195,119.1) ; C8.1 199.619,117.5 R13.1 ; TVS4.1 v1(208.788,151.892)
  other v1: 193.929,106.68 195.707,106.68 192.7,111.9 192.7,113.6 192.7,115.3 190,119 192.5,119 164.973,122.047 167.132,122.047 169.291,122.047 170.053,137.795 177.673,152.527
LDO_IN: C2.2 L1.2 pad.0@164.338,107.569 R2.2 TVS1.2 U2.3 | length 20.7
  Top Layer w0.5: 163.83,113.03 165.129,111.731 ; 165.354,111.506 167.11,109.75 L1.2
  Top Layer w1: U2.3 153.473,111.731 TVS1.2 165.129,111.731 165.354,111.506
MISO: Atm1.16 PL3.9 | length 17.7
  Top Layer w0.254: Atm1.16 174.864,138.669 173.863,137.668 173.863,135.382 174.752,134.493 178.181,134.493 178.943,133.731 178.943,130.937 PL3.9
MOSI: Atm1.15 PL3.1 | length 17.7
  Top Layer w0.22: PL3.1 169.037,129.667 168.275,130.429 168.275,133.223 174.521,139.469 Atm1.15
NC1: F3.14 P1.5 | length 59.1
  Bottom Layer w0.8: F3.14 139.319,161.676 139.319,199.136 152.12,211.937 P1.5
NC2: F6.14 P1.11 | length 24.3
  Bottom Layer w0.8: P1.11 169.672,205.978 169.672,192.664 F6.14
NC3: F7.14 P2.5 | length 23.9
  Top Layer w0.8: F7.14@111.379,191.267 113.157,193.045 113.157,203.2 118.895,208.938 P2.5
NC4: F9.14 P2.11 | length 26.1
  Top Layer w0.8: P2.11 130.673,212.1 138.176,204.597 138.176,194.696 F9.14
NC5: F4.14 P1.6 | length 10.2
  Top Layer w0.8: P1.6 152.12,195.357 F4.14
NC6: F5.14 P1.12 | length 43.3
  Bottom Layer w0.8: F5.14 159.258,162.692 159.258,193.929 163.55,198.221 P1.12
NC7: F8.14 P2.6 | length 23.8
  Bottom Layer w0.8: P2.6 118.895,196.238 117.094,194.437 117.094,188.341 124.709,180.726 F8.14
NC8: F10.14 P2.12 | length 52.1
  Top Layer w0.8: F10.14 123.571,153.548 123.571,182.626 130.325,189.38 P2.12
NetAtm1_7: Atm1.7 C5.2 XTL2.1 | length 8.1
  Top Layer w0.22: Atm1.7 180.747,147.294 180.213,147.828 180.213,149.479 181.261,150.527 XTL2.1@181.419,150.527
  Top Layer w0.254: XTL2.1 181.656,150.368 183.378,150.368 C5.2
NetAtm1_8: Atm1.8 C6.2 XTL2.3 | length 6.1
  Top Layer w0.25: C6.2 177.319,148.805 XTL2.3 179.119,147.779 179.947,146.951 Atm1.8
  Top Layer w0.254: XTL2.3@179.419,148.627 XTL2.3@179.519,148.527
NetC3_2: C3.2 C10.2 D2.1 R10.2 U3.2 | length 11.9
  Top Layer w0.254: U3.2 197.53,112.87 198.5,111.9 199.5,111.9
  Top Layer w1: 200.152,109.982 205.994,109.982 206.756,109.22 206.883,109.22 D2.1
NetC7_1: C7.1 U3.1 | length 13.2
  Top Layer w0.254: C7.1 186.5,111 ; U3.1@195.4,111.5 195.5,111.4 v1(195.5,110.2)
  Bottom Layer w0.254: v1(186.436,111.379) 186.436,111.164 188.2,109.4 194.7,109.4 v1(195.5,110.2)
NetC7_2: C7.2 D1.1 L1.1 U3.8
NetC8_2: C8.2 U3.4 | length 2.8
  Top Layer w0.3: U3.4 197.26,115.41 197.65,115.8 C8.2
NetC11_2: C11.2 R5.2 U3.6 | length 9.9
  Top Layer w0.4: C11.2 183.642,119.126 184.023,118.745 184.023,116.937 R5.2 184.12,116.329 186.309,114.14 U3.6
NetC14_2: C14.2 R5.1 | length 2.4
  Top Layer w0.6: R5.1 C14.2
NetD2_2: D2.2 F1.0 pad.0@204.597,119.888 | length 18.4
  Top Layer w1: F1.0@201.676,129.159 201.676,122.809 204.597,119.888 207.137,117.348 D2.2
NetD12_2: D12.2 F2.0 | length 2.6
  Top Layer w1: D12.2@198.247,126.936 F2.0@198.247,129.54
NetF11_2: F11.2 TVS2.2 TVS4.2 U1.A | length 21.1
  Top Layer w0.5: U1.A 200.025,153.924 200.787,153.162 TVS4.2@200.787,152.273 ; F11.2@200.152,146.177 200.152,145.542 200.025,145.415 197.993,145.415 196.596,144.018 195.834,144.018 195.199,144.653 195.199,147.447 197.104,149.352 199.136,149.352 201.086,151.302 TVS4.2
NetF12_2: F12.2 TVS2.1 TVS3.2 U1.B | length 21.8
  Top Layer w0.4: TVS2.1@197.358,141.65 197.567,141.859 199.771,141.859 200.152,141.478 F12.2@200.152,140.97
  Top Layer w0.5: TVS2.1@197.358,141.65 196.768,142.24 195.326,142.24 194.056,143.51 194.056,148.463 197.866,152.273 197.866,152.908 198.755,153.797 U1.B
NetLED1_1: LED1.1 R7.1 R11.1 | length 4.4
  Top Layer w0.5: R11.1 199.716,208.534 R7.1 199.39,208.14 LED1.1
NetLED2_1: LED2.1 R8.1 R27.1 | length 4.6
  Top Layer w0.5: LED2.1 199.415,196.423 R8.1 R27.1
NetLED3_1: LED3.1 R14.2 | length 3
  Top Layer w0.4: LED3.1@182.731,206.19 183.328,206.787 R14.2
NetLED4_1: LED4.1 R15.2 | length 3.1
  Top Layer w0.5: LED4.1 194.338,206.837 R15.2
NetLED5_1: LED5.1 R17.2 | length 3
  Top Layer w0.4: LED5.1@193.929,198.516 193.929,195.737 R17.2
NetLED6_1: LED6.1 R16.2 | length 3.2
  Top Layer w0.4: LED6.1@182.808,198.672 182.808,195.936 R16.2
NetLED7_1: LED7.1 R18.2 | length 3
  Top Layer w0.5: LED7.1 188.711,206.712 R18.2
NetLED8_1: LED8.1 R19.2 | length 3
  Top Layer w0.3: LED8.1@177.303,206.19 177.75,206.637 R19.2
NetLED9_1: LED9.1 R20.2 | length 3
  Top Layer w0.4: LED9.1@188.468,198.557 188.468,195.737 R20.2
NetLED10_1: LED10.1 R21.2 | length 3.5
  Top Layer w0.3: LED10.1@177.546,198.505 LED10.1 177.38,195.98 R21.2
NetR2_1: R2.1 R12.2 U3.5 | length 34.9
  Top Layer w0.35: R2.1 160.274,115.267 160.372,115.365 160.421,115.316 v1(162.433,115.316) ; v1(187.628,118.413) 187.579,118.364 187.579,117.831 U3.5
  Bottom Layer w0.35: v1(162.433,115.316) 185.039,115.316 187.628,117.905 v1(187.628,118.413)
NetR10_1: R10.1 R13.2 U3.3 | length 6.8
  Top Layer w0.5: U3.3 199.26,114.14 R10.1@199.6,113.8 ; R13.2 199.644,113.856 R10.1
NetR14_1: R14.1 R29.2 | length 2
  Top Layer w0.3: R29.2 183.31,211.69 R14.1@183.31,210.296
  Top Layer w0.5: R14.1@183.31,210.296 R14.1
NetR15_1: R15.1 R28.2 | length 2
  Top Layer w0.5: R28.2 194.338,211.711 R15.1
NetR16_1: R16.1 R30.2 | length 2
  Top Layer w0.3: R30.2 183.183,193.059 R16.1@183.183,194.261
  Top Layer w0.6: R16.1 R16.1@183.183,194.261
NetR17_1: R17.1 R31.2 | length 2.3
  Top Layer w0.3: R31.2 R17.1
NetR18_1: R18.1 R32.2 | length 2
  Top Layer w0.5: R32.2 188.711,211.75 R18.1
NetR19_1: R19.1 R33.2 | length 2
  Top Layer w0.4: R33.2 177.75,211.662 R19.1
NetR20_1: R20.1 R34.2 | length 2.2
  Top Layer w0.4: R34.2 188.341,194.31 R20.1@188.468,194.183
NetR21_1: R21.1 R35.2 | length 2
  Top Layer w0.3: R21.1 177.75,193.01 R35.2
NO1: F3.12 P1.1 | length 66.2
  Top Layer w0.8: F3.12 138.43,155.575 138.43,174.371 144.526,180.467 144.526,193.421 141.478,196.469 141.478,209.053 P1.1
NO2: F6.12 P1.7 | length 36
  Top Layer w0.8: P1.7 155.93,210.846 162.306,204.47 164.973,204.47 168.402,201.041 168.402,186.944 F6.12
NO3: F7.12 P2.1 | length 30
  Top Layer w0.8: P2.1 111.3,207.185 108.712,204.597 108.712,186.944 F7.12@111.379,184.277
NO4: F9.12 P2.7 | length 37.8
  Top Layer w0.8: P2.7 122.705,209.273 128.27,203.708 131.318,203.708 134.556,200.469 134.556,191.326 F9.12
NO5: F4.12 P1.2 | length 25.4
  Top Layer w0.8: P1.2 146.685,197.215 146.685,185.166 147.828,184.023 F4.12
NO6: F5.12 P1.8 | length 60.7
  Bottom Layer w0.8: F5.12 147.193,152.273 145.542,153.924 145.542,158.623 151.638,164.719 151.638,193.802 155.93,198.094 P1.8
NO7: F8.12 P2.2 | length 31.8
  Bottom Layer w0.8: P2.2 111.275,197.208 114.554,193.929 114.554,186.944 125.984,175.514 F8.12
NO8: F10.12 P2.8 | length 61.9
  Bottom Layer w0.8: P2.8 122.705,196.065 128.905,189.865 128.905,169.545 122.555,163.195 122.555,147.574 F10.12
PSU: F1.1 F2.1 P3.4 | length 9.7
  Top Layer w1: F2.1@198.247,133.784 203.02,133.784 205.433,131.371 206.189,131.371 P3.4
RESET: Atm1.29 C4.2 PL3.5 R6.1 | length 37.1
  Top Layer w0.254: Atm1.29 188.966,141.869 191.262,139.573 R6.1 194.945,139.573 v1(195.072,139.446)
  Bottom Layer w0.254: PL3.5 175.133,128.651 176.022,127.762 181.229,127.762 182.499,129.032 182.499,132.08 189.865,139.446 v1(195.072,139.446)
RTSX: Atm1.32 U1.TxEn1 U1.TxEn2 | length 27.5
  Top Layer w0.25: U1.TxEn2 U1.TxEn1
  Top Layer w0.254: Atm1.32 186.947,152.911 196.469,162.433 198.247,162.433 198.755,161.925 U1.TxEn2 ; U1.TxEn1@199.898,160.642 U1.TxEn1
RX: Atm1.30 R1.1 U1.Rx | length 29.9
  Top Layer w0.25: Atm1.30 188.897,142.669 189.357,143.129 189.357,152.4 195.707,158.75 200.533,158.75 201.295,159.512 U1.Rx 201.295,162.209 R1.1
SPCK: Atm1.17 PL3.7 | length 17.7
  Top Layer w0.254: PL3.7 177.673,129.286 178.816,128.143 180.848,128.143 181.737,129.032 181.737,133.858 180.34,135.255 178.562,135.255 178.054,135.763 178.054,136.779 178.544,137.269 Atm1.17
TX: Atm1.31 U1.Tx | length 23.1
  Top Layer w0.25: Atm1.31 188.3,143.469 188.595,143.764 188.595,153.162 195.948,160.515 U1.Tx
UL1: D3.14 F3.A1 LED7.2 | length 110.5
  Top Layer w0.3: F3.A1 144.653,132.842 157.353,132.842 158.369,133.858 158.369,146.304 173.863,161.798 v1(179.705,161.798) ; v1(186.055,202.438) 186.055,205.732 LED7.2@186.513,206.19 ; v1(186.69,176.911) 187.325,176.276 187.325,174.388 D3.14
  Bottom Layer w0.3: v1(179.705,161.798) 187.325,169.418 187.325,176.276 v1(186.69,176.911) 184.912,178.689 184.912,196.469 186.055,197.612 v1(186.055,202.438)
UL2: D3.12 F6.A1 LED4.2 | length 59.2
  Top Layer w0.3: F6.A1@171.069,167.259 F6.A1 172.085,168.275 186.944,168.275 189.85,171.181 D3.12 189.85,176.388 v1(190.119,176.657) ; LED4.2@191.883,205.98 191.883,203.468 v1(192.786,202.565)
  Bottom Layer w0.3: v1(190.119,176.657) 189.738,177.038 189.738,184.912 187.198,187.452 187.198,194.691 192.786,200.279 v1(192.786,202.565)
UL3: D3.18 F7.A1 LED8.2 | length 174.2
  Top Layer w0.25: F7.A1@111.379,167.767 115.316,163.83 115.316,135.509 120.523,130.302 159.893,130.302 162.433,132.842 162.433,147.447 174.625,159.639 v1(176.403,159.639) ; LED8.2 175.265,206.19 174.371,205.296 174.371,191.008 182.245,183.134 v1(182.245,177.8) D3.18
  Bottom Layer w0.25: v1(176.403,159.639) 176.403,171.958 v1(182.245,177.8)
UL4: D3.16 F9.A1 LED3.2 | length 87.9
  Top Layer w0.4: F9.A1 154.051,179.705 v1(180.086,179.705) ; v1(181.102,202.565) LED3.2@181.102,206.19 ; v1(181.864,188.087) 184.77,185.181 D3.16
  Bottom Layer w0.4: v1(180.086,179.705) 181.864,181.483 v1(181.864,188.087) 181.864,188.722 178.435,192.151 178.435,197.231 181.102,199.898 v1(181.102,202.565)
UL5: D3.13 F4.A1 LED9.2 | length 74.6
  Top Layer w0.3: F4.A1 160.147,163.83 164.465,163.83 167.894,167.259 167.894,168.529 169.545,170.18 186.69,170.18 188.58,172.07 D3.13 188.58,183.784 v1(186.817,185.547) ; LED9.2 186.69,200.533 187.833,201.676 v1(187.833,202.438)
  Bottom Layer w0.3: 186.817,185.166 v1(186.817,185.547) 186.055,186.309 186.055,195.834 187.833,197.612 v1(187.833,202.438)
UL6: D3.11 F5.A1 LED5.2 | length 93.4
  Top Layer w0.3: F5.A1 155.829,146.304 176.442,166.917 188.507,166.917 191.12,169.53 D3.11 ; v2(192.024,197.042) LED5.2
  Bottom Layer w0.3: v1(191.135,169.291) 196.215,174.371 196.215,192.405 v2(192.024,197.042)
UL7: D3.17 F8.A1 LED10.2 | length 147.3
  Top Layer w0.3: F8.A1 129.921,153.289 129.921,134.747 133.223,131.445 158.623,131.445 160.274,133.096 v1(160.274,132.969) ; LED10.2@175.768,198.672 175.895,198.545 175.895,191.516 183.5,183.911 D3.17
  Bottom Layer w0.3: v1(160.274,132.969) 160.274,148.844 175.514,164.084 175.514,184.277 179.324,188.087 v1(179.324,188.214)
UL8: D3.15 F10.A1 LED6.2 | length 120.9
  Top Layer w0.3: F10.A1 126.111,127.508 159.131,127.508 164.465,132.842 v1(164.465,133.096) ; v1(179.832,195.326) 181.131,196.625 LED6.2 ; v1(185.674,171.958) 186.04,172.324 D3.15
  Bottom Layer w0.3: v1(164.465,133.096) 164.465,145.288 178.181,159.004 178.181,164.465 v1(185.674,171.958) 183.896,173.736 183.896,188.722 179.832,192.786 v1(179.832,195.326)
X2X_OUTPUT: Atm1.23 R8.2 R27.2 | length 83.7
  Top Layer w0.254: v1(184.658,131.318) 184.912,131.318 184.747,131.483 Atm1.23
  Top Layer w0.3: R27.2@201.676,194.818 199.75,194.818 R8.2 199.75,193.75 202.184,191.316 v1(202.184,186.436)
  Bottom Layer w0.254: v1(184.658,131.318) 191.008,131.318 198.374,138.684 198.374,170.942
  Bottom Layer w0.3: 198.374,170.942 198.374,180.594 202.184,184.404 v1(202.184,186.436)
X_H: F12.1 P3.2 | length 3.5
  Top Layer w0.5: F12.1 203.302,141.02 P3.2
X_L: F11.1 P3.1 | length 3.5
  Top Layer w0.5: F11.1 203.329,146.1 P3.1
pads on no net: Atm1.20 D3.10 LG1.0 LG2.0 LG3.0 LG4.0 LG5.0 P3.3 PL3.3 PL3.4 PL3.6

## Polygon pours and split planes (outlines as drawn)
LDO_IN on Top Layer "Top Layer-No Net" (solid, remove dead copper, pour order 18): 155.956,111.633 161.671,111.633 165.354,115.316 168.275,115.316 170.815,112.776 170.942,112.649 170.942,107.188 170.942,106.426 170.688,106.172 170.307,105.791 160.02,105.791 155.956,109.855 155.956,110.744
NetC7_2 on Top Layer "Top Layer-No Net 1" (solid, pour order 23): 187.6,107.823 185.377,107.823 184.9,108.3 182.5,110.7 182.5,111.9 181.7,112.7 181.5,112.9 178.1,112.9 177.8,112.6 177.8,108.6 177.8,107.1 177.9,107 178.1,106.8 183,106.8 183.755,106.045 186.845,106.045 187.901,107.101
NetC7_2 on Top Layer "Top Layer-No Net 1" (solid, pour order 22): 189.8,111.9 188.3,111.9 187.9,111.5 187.8,111.4 187.8,109.8 187.8,108.298 187.1,107.598 187.1,106.4 187.1,106.3 187.3,106.1 188.3,106.1 188.6,106.4 188.6,109.2 188.6,110.8 189.1,111.3 189.9,111.3
NetC3_2 on Top Layer "Top Layer-No Net" (solid, pour order 25): 195.69,112.594 197.214,112.594 197.722,112.086 197.976,111.832 198.611,111.832 198.992,111.451 198.992,110.689 198.992,109.618 199.517,109.093 203.746,109.093 204.072,109.419 204.072,110.181 203.818,110.435 202.421,110.435 202.167,110.435 200.135,112.467 200.008,112.594 198.738,112.594 198.484,112.594 197.849,113.229 195.817,113.229
GND on Top Layer "Top Layer-No Net" (solid, pour order 26): 204.978,127.889 207.899,127.889 209.169,126.619 209.169,123.571 208.534,122.936 207.518,122.936 205.105,122.936 204.597,123.444 204.216,123.825 204.216,125.857 204.216,127.381 204.724,127.889
GND on Top Layer "Signal Layer 2-No Net" (solid, remove dead copper, pour order 16): 175.346,151.847 176.87,153.371 179.664,153.371 183.982,153.371 185.379,151.974 194.818,142.535 194.818,131.315 191.729,128.225 191.221,127.717 167.726,127.717 166.456,128.987 166.456,133.686 166.456,142.957 173.441,149.942
GND on Top Layer "Top Layer-No Net" (solid, remove dead copper, pour order 21): 156.718,115.443 156.718,118.745 157.988,120.015 159.004,121.031 162.306,121.031 163.449,119.888 163.449,119.761 163.449,118.11 162.433,117.094 161.798,116.459 160.147,116.459 159.258,116.459 158.877,116.078 158.242,115.443 158.115,115.443
GND on Top Layer "Top Layer-No Net 1" (solid, pour order 28): 202.3,108.1 202.6,108.1 202.9,107.8 202.9,106.3 202.4,105.8 200.2,105.8 190.3,105.8 190,106.1 189.9,106.2 189.9,107.3 189.9,109.9 190.1,110.1 191,110.1 191.2,110.3 191.5,110.6 191.5,112.2 191.2,112.5 190.6,112.5 190.1,112.5 189.9,112.7 189.9,113 190,113.1 190.1,113.2 191,113.2 191.5,113.7 191.5,113.9 191.5,115.4 191.5,116 190.8,116.7 190.6,116.9 189.9,116.9 188.9,117.9 188.9,119.4 189.3,119.8 189.6,120.1 191.4,120.1 198,120.1 198.8,119.3 199.3,118.8 200,118.8 200.5,118.3 200.5,117.8 200.5,117.2 200.2,116.9 194.6,116.9 194.3,116.6 193.9,116.2 193.9,110.9 193.9,110 195,108.9 196.2,107.7 199.9,107.7 201.1,107.7 201.5,108.1
GND on Top Layer "Top Layer-No Net 1" (solid, pour order 29): 162.6,117.6 168.9,117.6 171.2,119.9 171.9,120.6 183,120.6 189.1,120.6 189.8,119.9 190,119.7 196.4,119.7 196.4,121.3 195.2,122.5 194.5,123.2 170.3,123.2 164.4,123.2 162.5,121.3 162.2,121 162.2,118.6
GND on Bottom Layer "Top Layer-No Net 1" (solid, remove dead copper, pour order 19): 188.976,119.761 199.644,119.761 201.295,118.11 201.549,117.856 201.549,106.807 201.549,106.299 200.533,105.283 200.279,105.029 189.103,105.029 185.674,105.029 184.531,106.172 184.15,106.553 184.15,117.094 186.817,119.761
GND on Bottom Layer "Top Layer-No Net" (solid, pour order 30): 204.216,127.508 204.597,127.889 207.899,127.889 208.28,127.889 209.296,126.873 209.423,126.746 209.423,124.333 209.423,124.206 208.534,123.317 208.407,123.19 206.248,123.19 205.232,123.19 204.216,124.206 204.216,127.508
+5V on Bottom Layer "Top Layer-No Net 3" (solid, pour order 20): 143.637,120.587 154.559,120.587 154.686,120.459 155.194,119.951 155.194,117.538 155.194,117.03 154.559,116.395 143.637,116.395 143.256,116.776 143.256,117.03 143.256,120.206
GND on Bottom Layer "Top Layer-No Net 3" (solid, pour order 17): 166.717,135.763 166.717,142.748 178.274,154.305 191.228,154.305 193.387,152.146 194.022,151.511 194.022,141.732 194.022,129.54 192.498,128.016 191.355,126.873 169.511,126.873 168.876,126.873 166.717,129.032
GND on GND (split plane): 205.14,200.025 205.15,199.926 205.179,199.83 205.226,199.742 205.289,199.664 205.367,199.601 205.455,199.554 205.551,199.525 205.65,199.515 211.64,199.515 211.64,100.335 100.46,100.335 100.46,199.515 103.913,199.515 103.913,199.481 103.913,199.515 106.551,199.515 101.346,194.31 101.346,167.386 113.538,155.194 113.538,127.889 117.475,123.952 117.475,123.825 150.495,123.825 159.131,132.461 159.131,147.066 174.879,162.814 174.879,214.376 174.74,214.515 205.14,214.515
+5V on Power (split plane): 205.14,200.025 205.15,199.926 205.179,199.83 205.226,199.742 205.289,199.664 205.367,199.601 205.455,199.554 205.551,199.525 205.65,199.515 211.64,199.515 211.64,100.335 100.46,100.335 100.46,199.515 103.913,199.515 103.913,199.481 103.913,199.515 106.522,199.515 101.332,194.324 101.332,167.4 113.524,155.208 113.524,127.903 117.461,123.966 117.461,123.839 150.481,123.839 159.117,132.475 159.117,147.08 174.865,162.828 174.865,214.39 174.74,214.515 205.14,214.515

## Other copper
Top Layer:
  pour cut-out: 182.626,134.302 183.134,133.794 183.134,127.444 182.753,127.063 166.878,127.063 166.878,133.541 167.64,134.302
Bottom Layer:
  pour cut-out: 182.626,134.493 183.134,133.985 183.134,127.635 182.753,127.254 166.878,127.254 166.878,133.731 167.64,134.493
GND (plane layer: these items are gaps in the copper):
  pour cut-out: 107.05,215.025 107.064,215.011 174.244,215.011 174.879,214.376 174.879,162.814 159.131,147.066 159.131,132.461 150.495,123.825 117.475,123.825 117.475,123.952 113.538,127.889 113.538,155.194 101.346,167.386 101.346,194.31 106.95,199.914 106.95,200.025
  pour cut-out: 206.7,132.44 cw(c206.7,135.94) 203.2,135.94 cw(c206.7,135.94) 206.7,139.44 cw(c206.7,135.94) 210.2,135.94 cw(c206.7,135.94)
Power (plane layer: these items are gaps in the copper):
  pour cut-out: 107.036,215.04 107.05,215.025 174.23,215.025 174.865,214.39 174.865,162.828 159.117,147.08 159.117,132.475 150.481,123.839 117.461,123.839 117.461,123.966 113.524,127.903 113.524,155.208 101.332,167.4 101.332,194.324 106.935,199.928 106.935,200.04
  pour cut-out: 206.629,132.39 cw(c206.629,135.89) 203.129,135.89 cw(c206.629,135.89) 206.629,139.39 cw(c206.629,135.89) 210.129,135.89 cw(c206.629,135.89)

## Silkscreen, mask and mechanical layers (free items; w line width, h text height)
Top Overlay:
  drawing of 3804 lines, arcs and shapes, not listed
  text "........." at 199.974,191.567 h1
  text "LED" at 200.609,188.9 h2
  text "........." at 199.974,188.011 h1
  text "TP91" at 185.166,186.563 h1
  text "TP61" at 184.023,185.42 h1 r90
  text "TP51" at 179.832,183.642 h1 r90
  text "..........." at 197.561,182.956 h1
  text "..." at 177.241,180.848 h3 r90
  text "LDO1128" at 197.707,180.238 h2
  text "..........." at 197.561,179.222 h1
  text "TP41" at 183.134,179.07 h1 r90
  text "TP101" at 192.659,176.276 h1 r90
  text "........" at 202.082,169.342 h1
  text "..." at 177.419,166.878 h3 r90
  text "X2X" at 202.463,166.675 h2
  text "........" at 202.184,165.735 h1
  text "........" at 101.727,163.83 h1
  text "TP81" at 180.086,162.687 h1 r90
  text "Slave" at 101.473,160.782 h2
  text "........" at 101.727,159.258 h1
  text "TP4" at 174.879,155.702 h1 r90
  text "TP5" at 176.784,155.702 h1 r90
  text "TP6" at 178.689,155.702 h1 r90
  text "TP7" at 180.594,155.702 h1 r90
  text "TP8" at 182.499,155.702 h1 r90
  text "TP9" at 184.404,155.702 h1 r90
  text "TP10" at 186.309,155.702 h1 r90
  text "TP11" at 188.214,155.702 h1 r90
  text "Board" at 172.212,154.559 h1.5 r90
  text "Relay" at 170.053,153.543 h1.5 r90
  text "LORENTZ" at 166.497,140.97 h2.5 r90
  text "CPU" at 173.203,140.157 h2 r90
  text "......." at 170.18,139.014 h1 r90
  text "......." at 174.727,139.014 h1 r90
  text "USB" at 187.325,128.016 h1.5 r90
  text "ASP" at 189.357,128.016 h1.5 r90
  text "...." at 148.082,127.254 h3
  text "TP2" at 193.04,126.619 h1
  text "Service" at 163.576,125.984 h1.5 r90
  text "......." at 171.526,125.476 h1
  text "PSU" at 172.669,122.453 h2
  text "...." at 102.108,122.027 h3
  text "HIGH VOLTAGE SIDE" at 111.887,121.527 h1.5
  text "......." at 171.526,120.929 h1
  text "TP1" at 206.121,119.38 h1
  text "TP3" at 163.195,104.775 h1
  text "www.igasdetection.com" at 114.808,103.886 h1.1
  text "Serial:" at 180.594,101.092 h1.4
  text "MCTR.00010582.00.002" at 114.808,100.965 h1.4
Bottom Overlay:
  rectangle: 107.315,123.571 163.068,214.63
  rectangle: 100.584,160.401 112.395,199.39
  rectangle: 163.068,163.576 175.895,214.63
Board outlines:
  lines w0.2: 103.913,199.925 100.05,199.925 100.05,99.925 212.05,99.925 212.05,199.925 205.55,199.925 205.55,214.925 107.05,214.925 107.05,199.925 103.913,199.925 ; 103.913,199.925 103.913,199.925

## Text inside footprints (layer, text, board x,y; h text height)
PL3: Top Overlay "1" at 169.803,126.967 h1.5